# Altium PCB Reference-L_0v1.PcbDoc
Units mm, origin at the board's own origin, x right, y up, seen from the top; angles counter-clockwise.
Board outline 12.54 x 18.38 mm, 4 copper layers (TopLayer, GND, VCC, BottomLayer); 65 components, 43 nets, 214 pads, 36 vias.
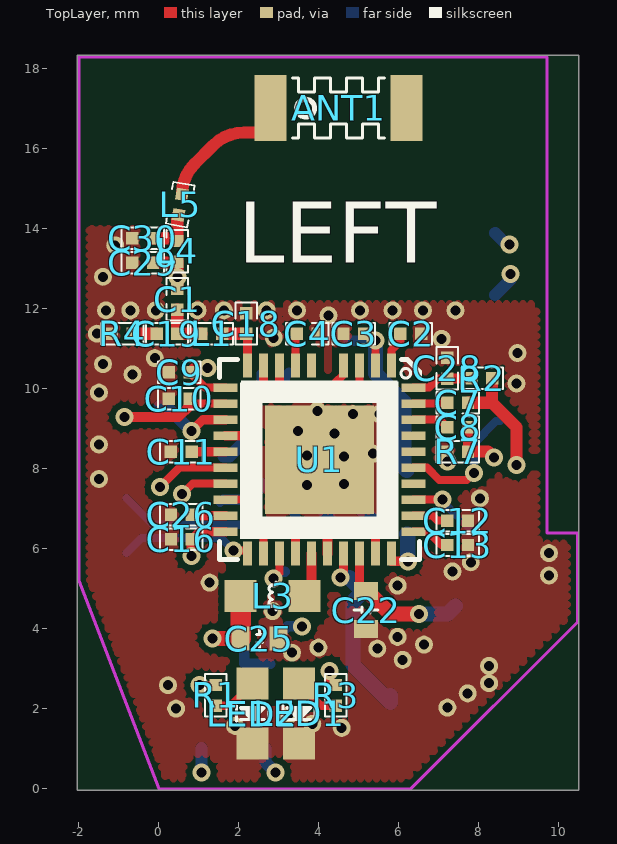
[diagram p0: TopLayer view]
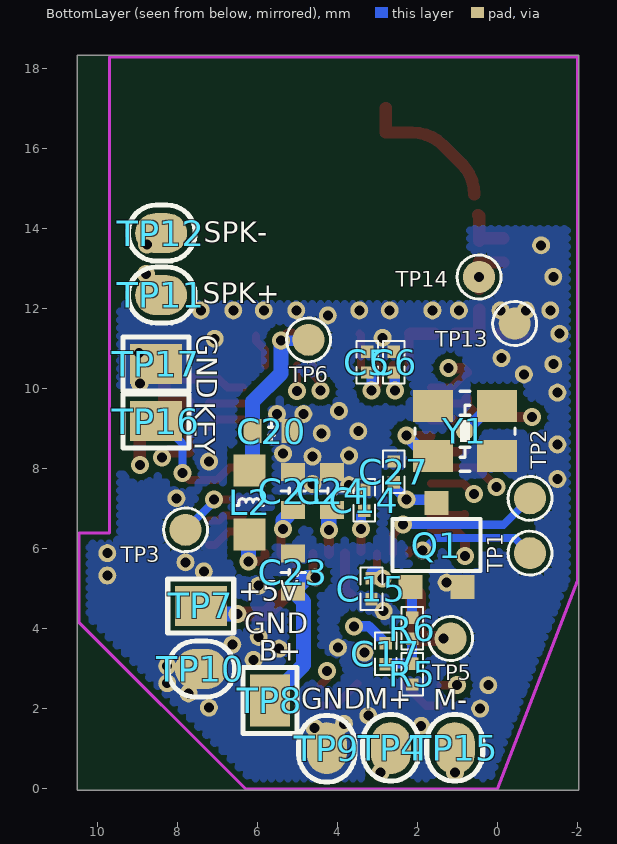
[diagram p1: BottomLayer view, seen from below]
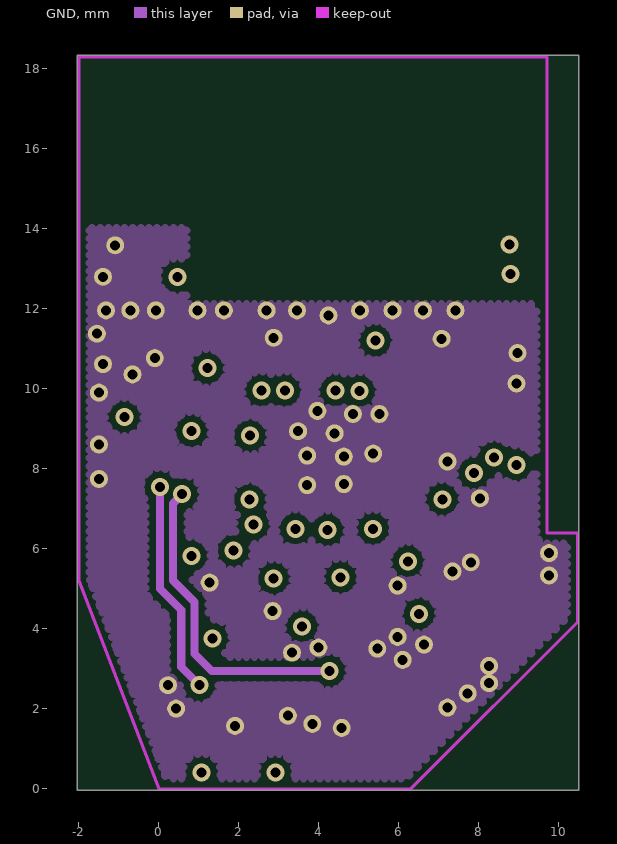
[diagram p2: GND]
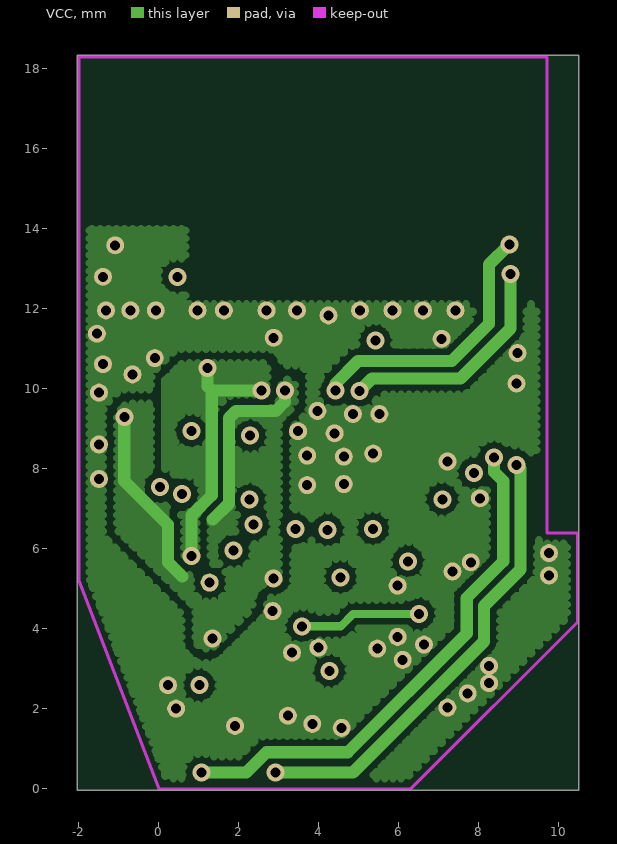
[diagram p3: VCC]

## Layer stack, top to bottom
TopSolder: solder mask 0.0102, Solder Resist, Dk 3.5
TopLayer: signal copper 0.0356
Dielectric1: core 0.32, FR-4, Dk 4.8
GND: signal copper 0.0356
Dielectric2: prepreg 0.32, FR-4, Dk 4.8
VCC: signal copper 0.0356
Dielectric3: core 0.32, FR-4, Dk 4.8
BottomLayer: signal copper 0.0356
BottomSolder: solder mask 0.0102, Solder Resist, Dk 3.5

## Board outline
-2.038,-0.038 10.502,-0.038 10.502,18.338 -2.038,18.338

## Design rules (kind name [scope] priority, off if disabled: settings)
Clearance Clearance_1 [(IsKeepOut) vs (InPoly)] p1: gap=0.127
Clearance Clearance_2 [(InPoly)] p2: gap=0.152
Clearance [All] p3: gap=0.127
ComponentClearance [All] p1 off: gap=0.254 collisioncheckmode=3 verticalgap=0.254 showdistances=FALSE
FabricationTestPointUsage TestPointUsage [All] p1: valid=0 allowmultiple=FALSE
FabricationTestpoint Testpoint [All] p1: side=3 testpointundercomponent=TRUE minsize=1.016 maxsize=2.54 preferedsize=1.524 minholesize=0.508 maxholesize=1.016 preferedholesize=0.813 testpointgrid=0.025 allowsidetop=TRUE allowsidebottom=TRUE usegrid=TRUE gridtolerance=0
PolygonConnect [All] p1: connectstyle=Direct reliefconductorwidth=0.254 reliefentries=4 polygonreliefangle="90 Angle" airgapwidth=0.254
RoutingLayers [All] p1: top layer_v5=TRUE mid layer 1_v5=FALSE mid layer 2_v5=FALSE bottom layer_v5=TRUE
RoutingVias [All] p1: holewidth=0.25 width=0.45 viastyle="Through Hole" minholewidth=0.25 minwidth=0.45 maxholewidth=0.8 maxwidth=1.2
SolderMaskExpansion [All] p1: expansion=0.06
Width [All] p1: maxlimit=2.54 minlimit=0.127 preferedwidth=0.305
26 further rules are at their usual default settings.

## Components (designator, comment, footprint, x,y, rotation, side; value= is the part's Value field where it differs from the comment)
ANT1 "ANTENNA-2" ANT-MITSUBISHI-AM03DP-ST01 2.794,17.018 r0 top
C1 "22pF" CAP_0201 0.457,12.243 r90 top
C2 "100nF" CAP_0201 6.299,11.379 r180 top
C3 "1uF" CAP_0201 4.877,11.379 r0 top
C4 "1uF" CAP_0201 3.708,11.379 r180 top
C5 "1uF" CAP_0201 3.251,10.668 r270 bottom
C6 "1uF" CAP_0201 2.591,10.668 r270 bottom
C7 "1uF" CAP_0201 7.468,9.652 r180 top
C8 "1uF" CAP_0201 7.468,9.042 r180 top
C9 "1uF" CAP_0201 0.508,10.414 r0 top
C10 "1uF" CAP_0201 0.508,9.754 r0 top
C11 "1uF" CAP_0201 0.559,8.433 r0 top
C12 "1uF" CAP_0201 7.468,6.706 r180 top
C13 "1uF" CAP_0201 7.468,6.096 r180 top
C14 "1uF" CAP_0201 3.327,7.214 r270 bottom
C15 "1uF" CAP_0201 3.15,5.004 r90 bottom
C16 "1uF" CAP_0201 0.563,6.244 r0 top
C17 "1uF" CAP_0201 2.794,3.378 r270 bottom
C18 "1.2pF" CAP_0201 2.184,11.633 r270 top
C19 "1pF" CAP_0201 0.203,11.379 r0 top
C20 "4.7uF/10V" CAP_0402 5.647,8.941 r0 bottom
C21 "4.7uF" CAP_0402 5.105,7.442 r270 bottom
C22 "4.7uF" CAP_0402 5.182,4.47 r90 top
C23 "4.7uF" CAP_0402 5.105,5.41 r270 bottom
C24 "4.7uF" CAP_0402 4.14,7.442 r270 bottom
C25 "4.7uF/10V" CAP_0402 2.515,3.759 r0 top
C26 "1uF" CAP_0201 0.563,6.853 r0 top
C27 "100nF" CAP_0201 2.591,7.925 r270 bottom
C28 "1uF" CAP_0201 7.214,10.516 r270 top
C29 "DNP" CAP_0201 -0.406,13.157 r0 top
C30 "DNP" CAP_0201 -0.406,13.767 r0 top
L1 "2.7nH" RES_0201 1.321,11.379 r180 top
L2 "2.2uH" IND_0603 6.198,7.163 r270 bottom
L3 "2.2uH" IND_0603 2.845,4.826 r0 top
L4 "0R" IND_0201 0.457,13.437 r90 top
L5 "0R" IND_0201 0.533,14.605 r80 top
LED1 "LED-RED" LED-0603 3.505,1.88 r90 top
LED2 "LED-BLUE" LED-0603 2.337,1.88 r90 top
Q1 "MMBT3904TT1" SOT323 1.524,6.096 r180 bottom
R1 "330R" RES_0201 1.422,2.337 r270 top
R2 "2.2k" RES_0201 8.077,10.262 r0 top
R3 "330R" RES_0201 4.42,2.337 r270 top
R4 "0R" RES_0201 -0.914,11.379 r180 top
R5 "10K" RES_0201 2.134,2.87 r90 bottom
R6 "10K" RES_0201 2.134,4.013 r90 bottom
R7 "2.2k" 0201 7.468,8.433 r0 top
TP1 "TEST POINT" TP-0.8MM -0.813,5.893 r180 bottom
TP2 "TEST POINT" TP-0.8MM -0.813,7.264 r180 bottom
TP3 "TEST POINT" TP-0.8MM 7.798,6.477 r180 bottom
TP4 "SOLDER PAD" TP-SOLDER 2.667,1.016 r180 bottom
TP5 "TEST POINT" TP-0.8MM 1.168,3.759 r180 bottom
TP6 "TEST POINT" TP-0.8MM 4.724,11.227 r180 bottom
TP7 "SOLDER PAD" TP-SOLDER-SQ 7.417,4.572 r270 bottom
TP8 "SOLDER PAD" TP-SOLDER-SQ 5.69,2.21 r0 bottom
TP9 "SOLDER PAD" TP-SOLDER 4.267,1.016 r0 bottom
TP10 "SOLDER PAD" TP-SOLDER 7.417,2.997 r270 bottom
TP11 "SOLDER PAD" TP-SOLDER 8.407,12.344 r270 bottom
TP12 "SOLDER PAD" TP-SOLDER 8.407,13.894 r270 bottom
TP13 "TEST POINT" TP-0.8MM -0.432,11.633 r180 bottom
TP14 "TEST POINT" TP-0.8MM 0.461,12.797 r180 bottom
TP15 "SOLDER PAD" TP-SOLDER 1.067,1.016 r180 bottom
TP16 "SOLDER PAD" TP-SOLDER-SQ 8.534,9.195 r270 bottom
TP17 "SOLDER PAD" TP-SOLDER-SQ 8.534,10.617 r270 bottom
U1 "RTL8763BFR" QFN-40_5X5 4.013,8.23 r270 top
Y1 "XTAL_40M" XTAL2.5X2.0-M 0.813,8.941 r180 bottom

## Footprints (in the part's own frame and the unit in brackets; to place one, negate y for a bottom-side part, rotate by r counter-clockwise, add the part's x,y. Pads: shape width x height; smd on the part's side, far side on the other; paste and mask are expansions set on the pad)
0201 [mm]
  rect 0.31x0.31 smd mask+0.08: 1(0.26,0) 2(-0.26,0)
  silkscreen extent -0.53,-0.27 0.53,0.27
ANT-MITSUBISHI-AM03DP-ST01 [mm]
  rect 0.8x1.65 smd: 1(0,0) 2(3.4,0)
  silkscreen extent 0.55,-0.75 2.85,0.75
CAP_0201 [mm]
  rect 0.31x0.31 smd mask+0.08: 1(0.26,0) 2(-0.26,0)
  silkscreen extent -0.53,-0.27 0.53,0.27
CAP_0402 [mm]
  rect 0.45x0.6 smd: 1(0.475,0) 2(-0.475,0)
  silkscreen extent -0.08,-0.3 0.08,0.3
IND_0201 [mm]
  rect 0.31x0.31 smd mask+0.08: 1(0.26,0) 2(-0.26,0)
  silkscreen extent -0.53,-0.27 0.53,0.27
IND_0603 [mm]
  rect 0.8x0.8 smd: 1(0.8,0) 2(-0.8,0)
  silkscreen extent -0.09,-0.35 0.08,0.35
LED-0603 [mm]
  rect 0.8x0.8 smd: 1(0.75,0) 2(-0.75,0)
  silkscreen extent -0.2,-0.4 0.2,0.4
QFN-40_5X5 [mm]
  rect 0.6x0.22 smd mask+0.05: 1(-2.35,1.8) 2(-2.35,1.4) 3(-2.35,1) 4(-2.35,0.6) 6(-2.35,-0.2) 7(-2.35,-0.6) 8(-2.35,-1) 9(-2.35,-1.4) 10(-2.35,-1.8) 21(2.35,-1.8) 22(2.35,-1.4) 23(2.35,-1) 24(2.35,-0.6) 25(2.35,-0.2) 26(2.35,0.2) 27(2.35,0.6) 28(2.35,1) 29(2.35,1.4) 30(2.35,1.8)
  rect 0.6x0.22 on Top Overlay mask+0.05: 5(-2.35,0.2)
  rect 0.22x0.6 smd mask+0.05: 11(-1.8,-2.35) 12(-1.4,-2.35) 13(-1,-2.35) 14(-0.6,-2.35) 15(-0.2,-2.35) 16(0.2,-2.35) 17(0.6,-2.35) 18(1,-2.35) 19(1.4,-2.35) 20(1.8,-2.35) 31(1.8,2.35) 32(1.4,2.35) 33(1,2.35) 34(0.6,2.35) 35(0.2,2.35) 36(-0.2,2.35) 37(-0.6,2.35) 38(-1,2.35) 39(-1.4,2.35) 40(-1.8,2.35)
  rect 2.72x2.72 smd paste-3 mask+0.05: 41(0,0)
  silkscreen extent -2.5,-2.5 2.5,2.5
RES_0201 [mm]
  rect 0.31x0.31 smd mask+0.08: 1(0.26,0) 2(-0.26,0)
  silkscreen extent -0.53,-0.27 0.53,0.27
SOT323 [mm]
  rect 0.6x0.6 smd: 1(-0.65,-1.05) 2(0.65,-1.05) 3(0,1.05)
  silkscreen extent -1.1,-0.65 1.1,0.65
TP-0.8MM [mm]
  round 0.8 smd: 1(0,0)
  silkscreen extent -0.55,-0.55 0.55,0.55
TP-SOLDER [mm]
  oval 1x1.3 smd: 1(0,0)
  silkscreen extent -0.7,-0.82 0.7,0.85
TP-SOLDER-SQ [mm]
  rect 1x1.3 smd: 1(0,0)
  silkscreen extent -0.68,-0.82 0.68,0.82
XTAL2.5X2.0-M [mm]
  rect 1x0.8 smd: 1(0.8,0.625) 2(-0.8,0.625) 3(-0.8,-0.625) 4(0.8,-0.625)
  silkscreen extent -1.25,-1 1.25,1

## Free pads (board coordinates)
  round 0.45 hole 0.25: 0(-1.549,11.379) 0(-1.499,7.747) 0(-1.499,8.611) 0(-1.499,9.906) 0(-1.397,10.617) 0(-1.397,12.802) 0(-1.321,11.963) 0(-1.092,13.589) 0(-0.711,11.963) 0(-0.66,10.363) 0(-0.102,10.77) 0(-0.076,11.963) 0(0.229,2.591) 0(0.432,2.007) 0(0.965,11.963) 0(1.27,5.156) 0(1.626,11.963) 0(1.905,1.575) 0(2.692,11.963) 0(2.845,4.445) 0(2.87,11.278) 0(3.226,1.829) 0(3.327,3.404) 0(3.454,11.963) 0(3.48,8.941) 0(3.708,7.595) 0(3.708,8.331) 0(3.835,1.626) 0(3.962,9.449) 0(3.988,3.531) 0(4.242,11.836) 0(4.394,8.89) 0(4.572,1.524) 0(4.623,7.62) 0(4.623,8.306) 0(4.851,9.373) 0(5.029,11.963) 0(5.359,8.382) 0(5.461,3.505) 0(5.512,9.373) 0(5.842,11.963) 0(5.969,3.799) 0(5.969,5.08) 0(6.096,3.226) 0(6.604,11.963) 0(6.629,3.607) 0(7.069,11.252) 0(7.214,2.032) 0(7.341,5.436) 0(7.417,11.963) 0(7.722,2.388) 0(7.798,5.664) 0(8.026,7.264) 0(8.255,2.642) 0(8.255,3.073) 0(8.941,10.135) 0(8.966,10.897) 0(9.754,5.334) 0(9.754,5.893)

## Via types
v1: diameter 0.45, hole 0.25, TopLayer to BottomLayer, tented both sides, 36 vias

## Nets (pads, with @x,y where several pads share a name; then routed paths per layer and width w, separated by ;. In a path a pad name is that pad's centre, name@x,y a point inside that pad or via, vN(x,y) a via of type N, cw(c..) or ccw(c..) an arc to the next point about the centre after c; other vN are vias at no path point)
AOUT_LN: TP12.1 U1.4 | length 8
  TopLayer w0.203: v1(4.42,9.957) 4.42,10.16 4.613,10.354 U1.4
  VCC w0.305: v1(4.42,9.957) 4.42,10.135 4.978,10.693 7.323,10.693 8.255,11.625 8.255,13.106 v1(8.763,13.614)
  BottomLayer w0.305: TP12.1 8.687,13.614 v1(8.763,13.614)
AOUT_LP: TP11.1 U1.3 | length 7.1
  TopLayer w0.203: v1(5.013,9.947) U1.3
  VCC w0.305: v1(5.013,9.947) 5.327,10.262 7.544,10.262 8.788,11.506 v1(8.788,12.878)
  BottomLayer w0.305: TP11.1 8.788,12.725 v1(8.788,12.878)
GND: C2.2 C3.2 C4.2 C5.2 C6.2 C9.2 C10.2 C11.2 C12.2 C13.2 C14.2 C15.2 C16.2 C18.2 C20.2 C21.2 C22.2 C23.2 C24.2 C25.1 C26.2 C27.2 C28.2 C29.2 C30.2 LED1.2 LED2.2 pad.0 Q1.2 R4.1 R5.2 R7.2 TP9.1 TP10.1 TP13.1 TP17.1 U1.41 Y1.2 Y1.4
  other v1: 7.214,8.179
KEY0: TP16.1 U1.35 | length 3.3
  TopLayer w0.203: U1.35 6.702,8.03 7.01,7.722 7.696,7.722 v1(7.874,7.899)
  BottomLayer w0.203: v1(7.874,7.899) 7.874,8.636 8.433,9.195 TP16.1
LOG: TP3.1 U1.33 | length 1.8
  TopLayer w0.203: U1.33 7.077,7.23 v1(7.087,7.239)
  BottomLayer w0.203: v1@7.077,7.23 7.077,7.198 TP3.1
LX_AUDIO: L2.1 U1.30 | length 1.3
  TopLayer w0.229: U1.30 5.813,5.69 v1(6.223,5.69)
  BottomLayer w0.381: L2.1 L2.1@6.223,6.337 ; v1(6.223,5.69) L2.1@6.223,6.363
LX_CORE: L3.1 U1.25 | length 1.1
  TopLayer w0.254: L3.1 3.813,4.994 U1.25
MIC1_N: C8.1 U1.38 | length 0.9
  TopLayer w0.203: U1.38 7.02,9.23 C8.1
MIC1_P: C7.1 U1.39 | length 0.9
  TopLayer w0.203: U1.39 7.185,9.63 C7.1
MIC_BIAS: C28.1 R2.2 U1.40 | length 1.6
  TopLayer w0.203: U1.40 6.753,10.03 6.985,10.262 C28.1@7.214,10.262
  TopLayer w0.254: C28.1 7.811,10.256 R2.2
NetANT1_1: ANT1.1 L5.1 | length 3.6
  TopLayer w0.305: L5.1 cw(c1.664,14.861) 0.896,15.628 1.353,16.085 cw(c2.134,15.305) 2.134,16.408 2.794,16.408 ANT1.1
NetC1_2: C1.2 C19.1 L1.1 | length 1.2
  TopLayer w0.305: C19.1@0.457,11.385 C1.2 ; C19.1 L1.1
NetC2_1: C2.1 U1.1 | length 0.8
  TopLayer w0.203: U1.1 5.813,10.969 6.039,11.195 C2.1@6.039,11.328
NetC4_1: C4.1 U1.7 | length 0.8
  TopLayer w0.203: U1.7 3.413,11.344 C4.1
NetC7_2: C7.2 R2.1 TP4.1 | length 15.1
  TopLayer w0.203: C7.2 C7.2@7.734,9.646
  TopLayer w0.305: C7.2 8.331,9.652 ; R2.1 8.331,10.256 8.331,9.652 ; v1(8.941,8.103) 8.941,9.042 8.331,9.652
  VCC w0.305: v1(2.921,0.406) 4.851,0.406 8.128,3.683 8.128,4.572 9.042,5.486 9.042,8.001 v1(8.941,8.103)
  BottomLayer w0.305: TP4.1 2.667,0.66 v1(2.921,0.406)
NetC8_2: C8.2 R7.1 TP15.1 | length 14.9
  TopLayer w0.254: R7.1 C8.2
  TopLayer w0.305: R7.1 8.23,8.433 v1(8.382,8.28)
  VCC w0.305: v1(1.067,0.406) 2.184,0.406 2.692,0.914 4.724,0.914 7.696,3.886 7.696,4.775 8.611,5.69 8.611,7.696 8.382,7.925 v1(8.382,8.28)
  BottomLayer w0.305: v1(1.067,0.406) TP15.1
NetC19_2: C19.2 R4.2 | length 0.6
  TopLayer w0.305: R4.2 C19.2
NetC30_1: C30.1 L4.1 L5.2 | length 1.3
  TopLayer w0.305: C30.1 0.387,13.767 L4.1 0.457,14.318 L5.2
NetL1_2: C18.1 L1.2 U1.10 | length 1.4
  TopLayer w0.229: C18.1 2.213,11.344 U1.10
  TopLayer w0.305: L1.2 C18.1@2.178,11.379
NetL4_2: C1.1 C29.1 L4.2 TP14.1 | length 1.3
  TopLayer w0.305: C29.1 0.438,13.157 L4.2 C1.1
  other v1: 0.461,12.797
NetQ1_1: Q1.1 R6.1 | length 0.8
  BottomLayer w0.254: R6.1 2.134,5.006 Q1.1
NetR1_1: LED2.1 R1.1 | length 1.1
  TopLayer w0.203: R1.1 1.784,2.077 LED2.1
NetR3_1: LED1.1 R3.1 | length 1.1
  TopLayer w0.203: LED1.1 4.058,2.077 R3.1
NetR6_2: C17.1 R5.1 R6.2 | length 1.3
  BottomLayer w0.254: R6.2 R5.1 2.782,3.13 C17.1
NetU1_15: C11.1 U1.15 | length 0.8
  TopLayer w0.229: C11.1 0.822,8.43 U1.15
NetU1_24: C14.1 U1.24 | length 1.1
  TopLayer w0.229: U1.24@3.413,5.93 v1(3.413,6.502) v1@3.413,6.452
  BottomLayer w0.254: C14.1 3.413,6.868 v1(3.413,6.502)
NetU1_26: C24.1 U1.26 | length 1.1
  TopLayer w0.254: U1.26 v1(4.216,6.477)
  BottomLayer w0.381: C24.1 4.216,6.891 v1(4.216,6.477)
NetU1_29: C21.1 U1.29 | length 1.2
  TopLayer w0.229: v1(5.359,6.502) 5.413,6.449 U1.29
  BottomLayer w0.381: C21.1 5.359,6.713 v1(5.359,6.502)
NetU1_32: C12.1 U1.32 | length 0.9
  TopLayer w0.203: U1.32 6.836,6.83 6.96,6.706 C12.1
P1_0: R1.2 U1.16 | length 7.6
  TopLayer w0.203: v1(0.025,7.544) 0.511,8.03 U1.16 ; v1(1.016,2.591) 1.416,2.591 R1.2
  GND w0.203: v1(0.025,7.544) 0.025,5.004 0.559,4.47 0.559,3.048 v1(1.016,2.591)
P1_1: R3.2 U1.17 | length 9.5
  TopLayer w0.203: v1(0.584,7.366) 0.848,7.63 U1.17 ; v1(4.267,2.946) 4.267,2.749 R3.2
  GND w0.203: v1(0.584,7.366) 0.356,7.137 0.356,5.207 0.889,4.674 0.889,3.378 1.321,2.946 v1(4.267,2.946)
RST_N: C27.1 Q1.3 U1.18 | length 2
  TopLayer w0.203: U1.18 v1(2.27,7.23)
  BottomLayer w0.203: Q1.3 Q1.3@1.608,7.23 ; C27.1@2.591,7.55 C27.1
  BottomLayer w0.254: Q1.3@1.608,7.23 v1(2.27,7.23) C27.1@2.591,7.55
UART_RX: TP1.1 U1.21 | length 3.4
  TopLayer w0.203: v1(1.867,5.956) 2.213,5.956 U1.21
  BottomLayer w0.203: TP1.1 -0.432,6.274 1.549,6.274 v1(1.867,5.956)
UART_TX: TP2.1 U1.22 | length 4.3
  TopLayer w0.203: v1(2.362,6.604) 2.613,6.353 U1.22
  BottomLayer w0.203: TP2.1 -0.152,6.604 v1(2.362,6.604)
VDD_1V2: C5.1 C10.1 C15.1 C25.2 L3.2 TP5.1 U1.8 U1.12 U1.23 | length 16
  TopLayer w0.203: C10.1 0.892,9.63 U1.12 ; v1(2.87,5.258) 3.013,5.401 U1.23
  TopLayer w0.229: U1.8 3.013,10.093 v1(3.15,9.957)
  TopLayer w0.254: v1(-0.864,9.296) 0.483,9.296 0.768,9.582 C10.1
  TopLayer w0.381: v1(1.346,3.759) C25.2@2.045,3.759
  TopLayer w0.508: C25.2@2.045,3.759 L3.2
  VCC w0.305: v1(-0.864,9.296) -0.864,7.696 0.229,6.604 0.229,5.664 0.584,5.309 ; 1.346,6.731 1.753,7.137 1.753,9.271 1.93,9.449 2.921,9.449 3.15,9.677 v1(3.15,9.957) ; v1@2.845,5.258 v1(2.87,5.258)
  BottomLayer w0.254: v1(2.87,5.258) 3.042,5.43 3.15,5.43 ; v1(3.15,9.957) 3.15,10.306 C5.1
VDD_1V8: C3.1 C20.1 L2.2 TP6.1 U1.2 | length 5.8
  TopLayer w0.203: U1.2 v1(5.413,11.204)
  TopLayer w0.254: C3.1 5.238,11.379 v1(5.413,11.204)
  BottomLayer w0.254: TP6.1 4.747,11.204 v1(5.413,11.204)
  BottomLayer w0.305: 5.413,10.64 v1(5.413,11.204)
  BottomLayer w0.381: v1(5.413,11.204) 5.413,10.386 6.122,9.677 6.122,8.039 L2.2
VDD_3V3: C6.1 C9.1 C16.1 U1.9 U1.11 U1.20 | length 10.2
  TopLayer w0.203: C9.1 1.152,10.03 U1.11
  TopLayer w0.229: C16.1 1.009,6.43 U1.20 ; v1(2.565,9.957) 2.613,10.005 U1.9
  TopLayer w0.254: C9.1 0.87,10.516 v1(1.219,10.516) ; v1(0.813,5.817) 0.813,6.234 C16.1
  VCC w0.305: v1(0.813,5.817) 0.813,6.833 1.321,7.341 1.321,9.957 ; v1(1.219,10.516) 1.219,10.058 1.321,9.957 ; v1(2.565,9.957) 1.321,9.957
  BottomLayer w0.254: v1(2.565,9.957) 2.565,10.383 C6.1
VDD_ADP: C17.2 C22.1 TP7.1 U1.28 | length 7.6
  TopLayer w0.229: U1.28 5.013,4.945 C22.1
  TopLayer w0.381: C22.1@5.258,4.895 5.784,4.369 v1(6.502,4.369)
  VCC w0.203: v1(3.581,4.064) 4.547,4.064 4.851,4.369 v1(6.502,4.369)
  BottomLayer w0.254: C17.2 3.22,4.064 v1(3.581,4.064)
  BottomLayer w0.381: v1(6.502,4.369) 7.214,4.369 TP7.1
VDD_LDO_AUX1: C26.1 U1.19 | length 0.9
  TopLayer w0.229: C26.1 0.846,6.83 U1.19
VDD_LDO_AUX2: C13.1 U1.31 | length 1
  TopLayer w0.203: U1.31 6.728,6.43 7.061,6.096 C13.1
VDD_VBAT: C23.1 TP8.1 U1.27 | length 4.8
  TopLayer w0.229: v1(4.547,5.283) 4.613,5.35 U1.27
  BottomLayer w0.381: v1(4.547,5.283) 4.757,5.283 C23.1 4.851,4.681 4.851,3.099 5.791,2.159 TP8.1@5.791,2.337
XI: U1.13 Y1.1 | length 2
  TopLayer w0.229: v1(0.813,8.941) 1.102,9.23 U1.13
  BottomLayer w0.305: Y1.1 0.188,9.566 v1(0.813,8.941)
XO: U1.14 Y1.3 | length 1.5
  TopLayer w0.229: U1.14 v1(2.276,8.83)
  BottomLayer w0.305: Y1.3 1.763,8.316 v1(2.276,8.83)
pads on no net: ANT1.2 U1.5 U1.6 U1.34 U1.36 U1.37

## Polygon pours and split planes (outlines as drawn)
GND on TopLayer "TopLayer-GND 1" (solid, remove dead copper, pour order 0): -2.388,12.116 10.465,12.116 10.465,0 -2.362,0
GND on TopLayer "TopLayer-GND" (solid, remove dead copper, pour order 2): -2.007,13.995 -0.508,13.995 -0.508,12.776 0.051,12.776 0.048,11.788 -2.007,11.862
GND on GND "GND-GND 1" (solid, remove dead copper, pour order 4): -2.032,14.021 0.686,14.021 0.686,12.116 -2.057,12.116 -2.057,13.97
GND on GND "GND-GND" (solid, remove dead copper, pour order 6): -2.362,12.116 10.465,12.116 10.465,0 -2.362,0
GND on VCC "VCC-GND 1" (solid, remove dead copper, pour order 8): -2.134,13.995 0.66,13.995 0.66,12.116 -2.134,12.116
VDD_3V3 on VCC "VCC-VDD_3V3" (hatched 90Degree grid 0.203 track 0.203, remove dead copper, pour order 10): 0.152,10.211 0.584,10.643 2.718,10.643 2.718,9.601 1.626,9.601 1.626,7.137 1.168,6.68 1.168,5.334 0.584,5.334 0.356,5.563 0.356,6.604 0.152,6.807
VDD_1V2 on VCC "VCC-VDD_1V2" (hatched 90Degree grid 0.203 track 0.203, remove dead copper, pour order 12): -0.025,9.627 -0.813,9.627 -1.041,9.398 -1.041,6.477 0.381,5.055 0.914,4.521 0.914,3.658 1.067,3.505 1.321,3.505 2.997,5.182 2.997,9.195 3.404,9.601 3.404,10.236 1.575,10.236 0.973,9.627
GND on VCC "VCC-GND" (solid, remove dead copper, pour order 14): -2.362,12.116 10.465,12.116 10.465,0 -2.362,0
GND on BottomLayer "BottomLayer-GND 1" (solid, remove dead copper, pour order 16): -2.388,12.116 10.465,12.116 10.465,0 -2.362,0
GND on BottomLayer "BottomLayer-GND" (solid, remove dead copper, pour order 18): -2.007,13.995 0.686,13.995 0.66,12.09 -2.007,12.09

## Keep-outs
KeepOutLayer:
  lines w0.076: -2,5.2 0,0 6.3,0 10.464,4.164 10.464,6.4 9.7,6.4 9.7,18.3 -2,18.3 -2,5.2
  text ".Layer_Name" at 28.558,-23.991 h1.78

## Other copper
TopLayer:
  text ".Layer_Name" at -34.842,-11.291 h1.27
  text ".Layer_Name" at 28.558,-23.991 h1.78
GND:
  text ".Layer_Name" at -34.842,-15.391 h1.27
  text ".Layer_Name" at 28.558,-23.991 h1.78
VCC:
  text ".Layer_Name" at -34.842,-19.291 h1.27
  text ".Layer_Name" at 28.558,-23.991 h1.78
BottomLayer:
  text ".Layer_Name" at -34.842,-23.391 h1.27
  text ".Layer_Name" at 28.558,-23.991 h1.78

## Silkscreen, mask and mechanical layers (free items; w line width, h text height)
TopOverlay:
  region: 2.057,10.211 2.057,9.652 5.969,9.652 5.969,10.211
  rectangle: 2.032,6.248 2.591,10.16
  region: 2.032,6.807 2.032,6.248 5.994,6.248 5.994,6.807
  rectangle: 5.436,6.274 5.994,10.185
  text "LEFT" at 1.981,13.157 h1.52
  text ".Layer_Name" at 28.558,-23.991 h1.78
BottomOverlay:
  text "SPK-" at 7.341,13.665 h0.51
  text "SPK+" at 7.366,12.141 h0.51
  text "GND" at 7.518,11.354 h0.51 r90
  text "KEY" at 7.569,9.677 h0.51 r90
  text "+5V" at 6.477,4.699 h0.51
  text "GND" at 6.325,3.886 h0.51
  text "B+" at 5.969,3.2 h0.51
  text "M+" at 3.327,2.007 h0.51
  text "GND" at 4.902,2.007 h0.51
  text "M-" at 1.6,1.981 h0.51
  text ".Layer_Name" at 28.558,-23.991 h1.78
TopSolder:
  text ".Layer_Name" at 28.558,-23.991 h1.78
BottomSolder:
  text ".Layer_Name" at 28.558,-23.991 h1.78
Mechanical16:
  circle w0.254: c-44.919,-15.034 r1.246
  circle w0.254: c-44.919,-15.72 r4.318
  circle w0.254: c-44.919,-15.466 r4.064
  circle w0.254: c-44.919,-14.907 r1.144
  circle w0.254: c-44.925,-14.806 r1.047
  circle w0.254: c-44.919,-16.431 r1.144
  circle w0.254: c-44.919,-16.558 r1.246
  circle w0.254: c-44.925,-16.33 r1.047
  circle w0.254: c-44.919,-17.854 r1.144
  circle w0.254: c-44.919,-17.981 r1.246
  circle w0.254: c-44.925,-17.752 r1.047
  circle w0.254: c-44.919,-15.593 r4.193
  rectangle: -47.967,-16.482 -47.662,-16.304
  rectangle: -42.15,-16.558 -41.922,-16.203
  lines w0.254: -42.074,-16.66 -44.919,-9.116 ; -42.049,-16.66 -41.871,-16.482 ; 55.558,-5.491 55.813,-5.491 ; -47.967,-16.482 -47.764,-16.685 -44.919,-9.116 ; -47.967,-16.482 -50.761,-13.688 -39.077,-13.688 -41.871,-16.482 ; -47.967,-16.482 -44.919,-9.116 ; -44.919,-9.116 -41.871,-16.482 ; -41.871,-16.482 -41.896,-16.482 -41.871,-16.482 ; -52.442,-24.991 -52.442,-6.991 -37.442,-6.991 -37.442,-24.991 -52.442,-24.991 ; -36.442,-24.991 -36.442,-6.991 -21.442,-6.991 -21.442,-24.991 -36.442,-24.991 ; -35.442,-24.241 -35.442,-21.241 -22.442,-21.241 -22.442,-24.241 -35.442,-24.241 ; -35.442,-20.241 -35.442,-17.241 -22.442,-17.241 -22.442,-20.241 -35.442,-20.241 ; -35.442,-16.241 -35.442,-13.241 -22.442,-13.241 -22.442,-16.241 -35.442,-16.241 ; -35.442,-12.241 -35.442,-9.241 -22.442,-9.241 -22.442,-12.241 -35.442,-12.241 ; -20.442,-24.991 -20.442,-19.991 -6.942,-19.991 -6.942,-24.991 -20.442,-24.991 ; -20.442,-18.991 -20.442,-13.491 -6.942,-13.491 -6.942,-18.991 -20.442,-18.991 ; -20.442,-12.491 -20.442,-6.991 -6.942,-6.991 -6.942,-12.491 -20.442,-12.491 ; -5.942,-24.991 -5.942,-19.991 21.058,-19.991 21.058,-24.991 -5.942,-24.991 ; -5.942,-18.991 -5.942,-13.491 28.058,-13.491 28.058,-18.991 -5.942,-18.991 ; -5.942,-12.491 -5.942,-6.991 39.058,-6.991 39.058,-12.491 -5.942,-12.491 ; 22.058,-24.991 22.058,-19.991 55.558,-19.991 55.558,-24.991 22.058,-24.991 ; 29.058,-18.991 29.058,-13.491 39.058,-13.491 39.058,-18.991 29.058,-18.991 ; 40.058,-18.991 40.058,-13.491 55.558,-13.491 55.558,-18.991 40.058,-18.991 ; 40.058,-12.491 40.058,-6.991 55.558,-6.991 55.558,-12.491 40.058,-12.491
  lines w0.381: -52.698,-26.491 cw(c-52.698,-25.247) -53.942,-25.247 -53.942,-6.736 cw(c-52.698,-6.736) -52.698,-5.491 55.808,-5.491 ; -52.692,-26.491 55.808,-26.491 ; 55.813,-26.491 ccw(c55.813,-25.247) 57.058,-25.247 57.058,-15.991 57.058,-6.741 ; 55.813,-5.491 cw(c55.813,-6.736) 57.058,-6.736
  text "PCB Stack" at -34.192,-8.741 h1.27
  text "PCB Thinkness:" at -19.442,-8.991 h1.14
  text "Title:" at -4.942,-8.991 h1.14
  text "Author:" at 41.058,-8.991 h1.14
  text "mm" at -17.442,-11.491 h1.78
  text "Reference L ch (RTL8763BFR)" at 0.058,-11.491 h1.78
  text "PCB Layer :" at -19.442,-15.491 h1.14
  text "PCB no.:" at -4.942,-15.491 h1.14
  text "REV.:" at 30.058,-15.491 h1.14
  text "Date:" at 41.058,-15.491 h1.14
  text "Reference L ch" at 0.058,-17.991 h1.78
  text "0.1" at 33.558,-17.991 h1.78
  text ".Print_Date" at 41.058,-17.991 h1.14
  text "4L" at -14.942,-18.491 h1.78
  text "Dimension:" at -19.442,-21.991 h1.14
  text "File name:" at -4.942,-21.991 h1.14
  text "Layer:" at 23.058,-21.991 h1.14
  text "HerzTek" at -49.718,-23.061 h1.52
  text ".Pcb_File_Name_No_Path" at -4.942,-23.991 h1.14
  text "mm" at -19.533,-24.206 h1.14

## Text inside footprints (layer, text, board x,y; h text height)
LED1: Mechanical5 "+" at 4.005,3.38 h1.02 r90
LED2: Mechanical5 "+" at 2.837,3.38 h1.02 r90
U1: Mechanical5 "1" at 5.513,10.33 h1.52 r180